# EAGLE board untitled (EAGLE 5.07)

Size 100 x 80 mm. Coordinates in mm from the lower left corner, seen from the top.
Outline: 0,0 100,0 100,80 0,80 0,0
Copper layers (1*16): Top 0.035mm / dielectric 1.5mm / Bottom 0.035mm
Design rules "default": minimum track width 10mil, minimum drill 24mil, track to track 8mil, track to pad 8mil, pad to pad 8mil, via to via 8mil, smd to smd 8mil, copper to edge 40mil, drill to drill 8mil, minimum pad ring 10mil, minimum via ring 8mil, stop-mask expansion 4mil, vias tented up to drill 0mil, thermal gap 10mil

## Footprints (pad centres in the part's own frame; a part is rotated, then mirrored left to right if it is on the bottom)
SN76488 = smd 1.27 x 0.66: P$1 2.25,0.5; P$2 2.25,2.25; P$3 2.25,4; P$4 2.25,5.75; P$5 2.25,7.5; P$6 2.25,9.25; P$7 2.25,11; P$8 1,12.75; P$9 3,14.5; P$10 1,11; P$11 3,12.75; P$12 1,14.5; P$13 3,16.25; P$14 14.5,11; P$15 16.5,12.75; P$16 14.5,14.5; P$17 16.5,16.25; P$18 14.5,16.25; P$19 16.5,18; P$20 14.5,11; P$21 16.5,12.75; P$22 14.5,9.25; P$23 16.5,11; P$24 16.5,9.25; P$25 14.5,11; P$26 16.5,12.75; P$27 14.5,12.75; P$28 15.75,0.5; P$29 15.75,2.25; P$30 15.75,4; P$31 15.75,5.75; P$32 15.75,7.5; P$33 15.75,9.25; P$34 15.75,11; P$35 14.5,12.75; P$36 16.5,14.5; P$37 16.5,9.25; P$38 14.5,7.5; P$39 16.5,9.25; P$40 16.5,7.5; P$41 14.5,9.25; P$42 16.5,11; P$43 14.5,11; P$44 16.5,7.5; P$45 14.5,14.5; P$46 16.5,16.25; P$47 16.5,14.5; P$48 14.5,16.25; P$49 16.5,18; P$50 14.5,18; P$51 16.5,14.5; P$52 14.5,18; P$53 16.5,19.75; P$54 16.5,18; P$55 14.5,19.75; P$56 16.5,21.5; P$57 14.5,21.5; P$58 16.5,18; P$59 14.5,19.75; P$60 16.5,21.5; P$61 16.5,19.75; P$62 14.5,21.5; P$63 16.5,23.25; P$64 14.5,23.25; P$65 16.5,19.75; P$66 14.5,4; P$67 16.5,5.75; P$68 16.5,4; P$69 14.5,5.75; P$70 16.5,7.5; P$71 14.5,7.5; P$72 16.5,4; P$73 14.5,0.5; P$74 16.5,2.25; P$75 16.5,0.5; P$76 14.5,2.25; P$77 16.5,4; P$78 14.5,4; P$79 16.5,0.5; P$80 15.75,12.75; P$81 15.75,14.5; P$82 15.75,16.25; P$83 15.75,18; P$84 15.75,19.75; P$85 15.75,21.5; P$86 15.75,23.25; P$87 14.5,23.25; P$88 14.5,23.25; P$89 14.5,21.5; P$90 16.5,23.25; P$91 16.5,21.5; P$92 14.5,23.25; P$93 16.5,21.5; P$94 14.5,19.75; P$95 16.5,21.5; P$96 16.5,19.75; P$97 14.5,21.5; P$98 16.5,23.25; P$99 14.5,23.25; P$100 16.5,19.75; P$101 14.5,16.25; P$102 16.5,18; P$103 16.5,16.25; P$104 14.5,18; P$105 16.5,19.75; P$106 14.5,19.75; P$107 16.5,16.25; P$108 14.5,12.75; P$109 16.5,14.5; P$110 16.5,12.75; P$111 14.5,14.5; P$112 16.5,16.25; P$113 14.5,16.25; P$114 16.5,12.75; P$115 1,16.25; P$116 3,18; P$117 1,11; P$118 3,12.75; P$119 1,9.25; P$120 3,11; P$121 3,9.25; P$122 1,11; P$123 3,12.75; P$124 1,12.75; P$125 3,9.25; P$126 1,7.5; P$127 3,9.25; P$128 3,7.5; P$129 1,9.25; P$130 3,11; P$131 1,11; P$132 3,7.5; P$133 1,14.5; P$134 3,16.25; P$135 3,14.5; P$136 1,16.25; P$137 3,18; P$138 1,18; P$139 3,14.5; P$140 1,18; P$141 3,19.75; P$142 3,18; P$143 1,19.75; P$144 3,21.5; P$145 1,21.5; P$146 3,18; P$147 1,19.75; P$148 3,21.5; P$149 3,19.75; P$150 1,21.5; P$151 3,23.25; P$152 1,23.25; P$153 3,19.75; P$154 1,4; P$155 3,5.75; P$156 3,4; P$157 1,5.75; P$158 3,7.5; P$159 1,7.5; P$160 3,4; P$161 1,0.5; P$162 3,2.25; P$163 3,0.5; P$164 1,2.25; P$165 3,4; P$166 1,4; P$167 3,0.5; P$168 2.25,12.75; P$169 2.25,14.5; P$170 2.25,16.25; P$171 2.25,18; P$172 2.25,19.75; P$173 2.25,21.5; P$174 2.25,23.25; P$175 1,23.25; P$176 1,23.25; P$177 1,21.5; P$178 3,23.25; P$179 3,21.5; P$180 1,23.25; P$181 3,21.5; P$182 1,19.75; P$183 3,21.5; P$184 3,19.75; P$185 1,21.5; P$186 3,23.25; P$187 1,23.25; P$188 3,19.75; P$189 1,16.25; P$190 3,18; P$191 3,16.25; P$192 1,18; P$193 3,19.75; P$194 1,19.75; P$195 3,16.25; P$196 1,12.75; P$197 3,14.5; P$198 3,12.75; P$199 1,14.5; P$200 3,16.25; P$201 1,16.25; P$202 3,12.75

## Placement (x,y rotation side)
U$1  SN76488  [SN76488]  41.91,33.02 0 top

## Library data of the parts
U$1 = 00_steve

## Tracks (layer width: path | path; a pad name or v marks a point on that pad's centre or on a via)
(copper drawn outside any net)
  shapes: Top area x48, Top circle x84